# Altium PCB Front_PCB.PcbDoc
Units mm, origin at the board's own origin, x right, y up, seen from the top; angles counter-clockwise.
Board outline 89 x 28 mm, 2 copper layers (Top Layer, Bottom Layer); 19 components, 30 nets, 111 pads, 152 vias.
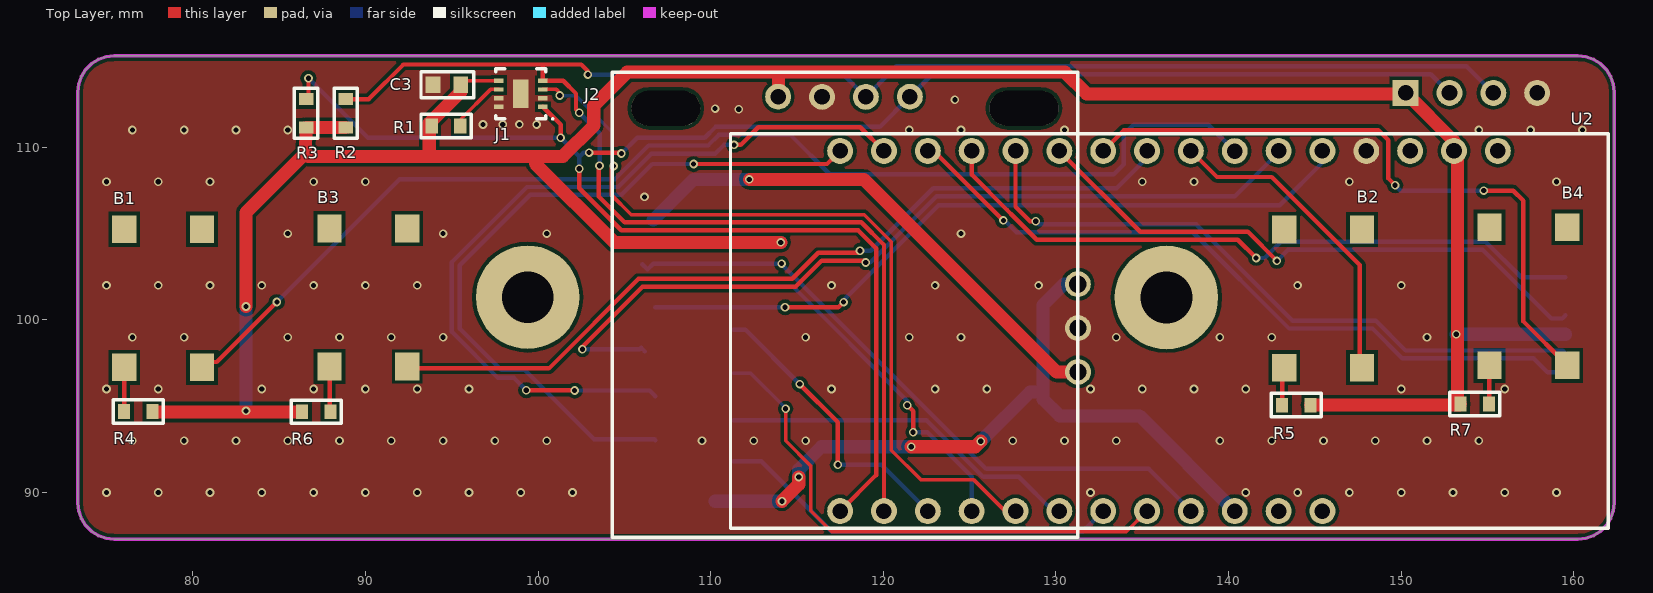
[diagram p0: Top Layer view]
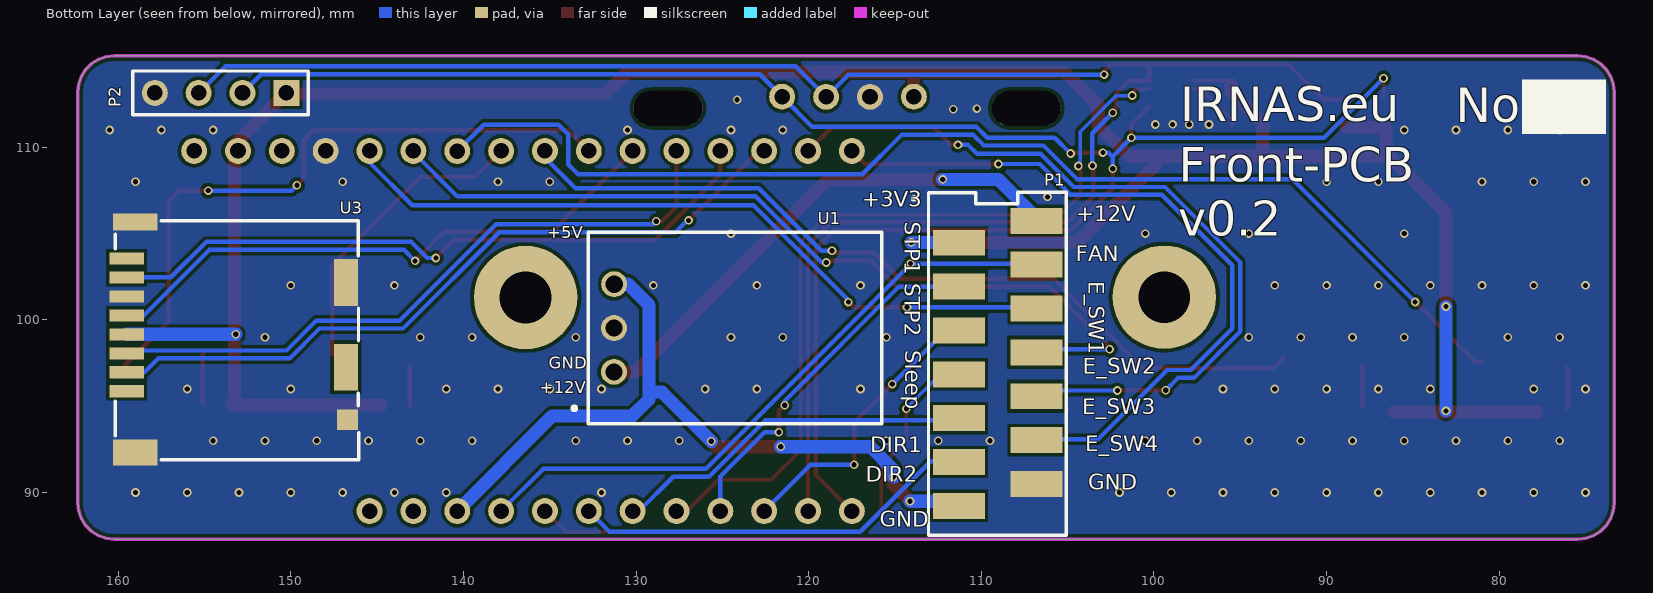
[diagram p1: Bottom Layer view, seen from below]

## Layer stack, top to bottom
Top Solder: solder mask 0.0102, Solder Resist, Dk 3.5
Top Layer: signal copper 0.0356
Dielectric 1: dielectric 0.32, FR-4, Dk 4.8
Bottom Layer: signal copper 0.0356
Bottom Solder: solder mask 0.0102, Solder Resist, Dk 3.5

## Board outline
160.24,87.3 75.44,87.3 74.973,87.353 74.529,87.508 74.131,87.758 73.798,88.091 73.548,88.489 73.393,88.933 73.34,89.4 73.34,113.2 73.393,113.667 73.548,114.111 73.798,114.509 74.131,114.842 74.529,115.092 74.973,115.247 75.44,115.3 160.24,115.3 160.707,115.247 161.151,115.092 161.549,114.842 161.882,114.509 162.132,114.111 162.287,113.667 162.34,113.2 162.34,89.4 162.287,88.933 162.132,88.489 161.882,88.091 161.549,87.758 161.151,87.508 160.707,87.353

## Design rules (kind name [scope] priority, off if disabled: settings)
Clearance Clearance_1 [All] p1: gap=0.203 ignorepadtopadclearanceinfootprint=FALSE except(0: Arc-Hole Track-Hole SMDPad-Hole THPad-Hole Via-Hole Fill-Hole Poly-Hole Region-Hole Text-Hole)
PolygonConnect [All] p1: connectstyle=Direct reliefconductorwidth=0.254 reliefentries=4 polygonreliefangle="90 Angle" airgapwidth=0.254
RoutingVias [All] p1: holewidth=0.3 width=0.5 viastyle="Through Hole" minholewidth=0.3 minwidth=0.5 maxholewidth=0.3 maxwidth=0.5
SilkToSolderMaskClearance [IsPad] p1: minsilkscreentomaskgap=0.01 clearancetoexposedcopper=TRUE
SolderMaskExpansion [All] p1: expansion=0.102
Width [All] p1: maxlimit=0.762 minlimit=0.203 preferedwidth=0.254
29 further rules are at their usual default settings.

## Components (designator, comment, footprint, x,y, rotation, side; value= is the part's Value field where it differs from the comment)
B1 "B3FS-1050" B3F-1050 80.53,97.25 r90 top
B2 "B3FS-1050" B3F-1050 147.73,97.24 r90 top
B3 "B3FS-1050" B3F-1050 92.42,97.3 r90 top
B4 "B3FS-1050" B3F-1050 159.62,97.37 r90 top
C3 "0.1uF" CAP0603 94.8,113.6 r0 top
J1 "SHT31" SON50P250X100_HS-9N 99,113.1 r180 top
J2 "LCD" LCD_DISPLAY 116.54,107.24 r0 top
P1 "micro_match" MICRO_MATCH 106.8,103.2 r180 bottom
P2 "Header 4" HDR1X4 150.26,113.15 r0 bottom
R1 "4K7" RES0603 94.8,111.1 r180 top
R2 "4K7" RES0603 89,112.1 r270 top
R3 "4K7" RES0603 86.7,112.1 r270 top
R4 "4K7" RES0603 76.71,94.83 r0 top
R5 "4K7" RES0603 143.8,95.2 r0 top
R6 "4K7" RES0603 87.28,94.55 r180 top
R7 "4K7" RES0603 154.4,95 r180 top
U1 "Voltage regulator" DC-DC 116.78,99.48 r270 bottom
U2 "ESP32" ESP32 133.16,98.98 r270 top
U3 "SD_CARD" SD_CARD 152.52,98.88 r270 bottom

## Footprints (in the part's own frame and the unit in brackets; to place one, negate y for a bottom-side part, rotate by r counter-clockwise, add the part's x,y. Pads: shape width x height; smd on the part's side, far side on the other; paste and mask are expansions set on the pad)
B3F-1050 [mm]
  rect 1.6x1.4 smd: 1(8,0) 2(0,0) 3(8,4.5) 4(0,4.5)
  body extent 0.02,-0.9 8.02,5.4, height 10.5
CAP0603 [mm]
  rect 0.85x0.95 smd: 1(-0.88,0.03) 2(0.72,0.03)
  silkscreen extent -1.58,-0.73 1.48,0.78, body extent -0.88,-0.37 0.72,0.43, height 0.6
DC-DC [mm]
  round 1.501 hole 1: 1(2.49,-14.5) 2(-0.05,-14.5)
  round 1.5 hole 1: 3(-2.59,-14.49)
  silkscreen extent -5.6,-16.9 5.5,1, body extent -5.6,-15.98 5.49,0.96, height 9.3
ESP32 [mm]
  round 1.5 hole 0.9: 1(-10.81,22.44) 2(-10.81,19.9) 3(-10.81,17.36) 4(-10.81,14.82) 5(-10.81,12.28) 6(-10.81,9.74) 7(-10.8,7.2) 8(-10.81,4.66) 9(-10.81,2.12) 10(-10.81,-0.42) 11(-10.81,-2.96) 12(-10.81,-5.5) 13(-10.81,-8.04) 14(-10.81,-10.58) 15(-10.81,-13.12) 16(-10.81,-15.66) 17(10.05,-15.66) 18(10.05,-13.12) 19(10.05,-10.58) 20(10.05,-8.04) 21(10.05,-5.5) 22(10.05,-2.96) 23(10.05,-0.42) 24(10.05,2.12) 25(10.05,4.66) 26(10.05,7.2) 27(10.05,9.74) 28(10.05,12.28)
  silkscreen extent -11.81,-22.01 11.04,28.83
HDR1X4 [mm] "Connector; Header; 4 Position"
  rect 1.5x1.5 hole 0.9: 1(0,0)
  round 1.5 hole 0.9: 2(2.54,0) 3(5.08,0) 4(7.62,0)
  silkscreen extent -1.27,-1.27 8.89,1.27
LCD_DISPLAY [mm]
  round 1.5 hole 0.9: 1(-2.63,5.69)
  round 1.501 hole 0.9: 2(-0.09,5.68) 3(2.45,5.68) 4(5,5.69)
  oval 4x2 hole 2.032 slot 3.988 at 0 deg unplated: ""(-9.14,5.02) ""(11.61,5.02)
  silkscreen extent -12.23,-19.84 14.73,7.12, body extent -12.15,-19.79 14.55,8.07, height 4.77
MICRO_MATCH [mm]
  rect 3x1.5 smd: 1(-4.5,1.27) 2(-4.5,-1.27) 3(-4.5,-3.81) 4(-4.5,-6.35) 5(-4.5,-8.89) 6(-4.5,-11.43) 7(-4.5,-13.97) 8(0,-12.7) 9(0,-10.16) 10(0,-7.62) 11(0,-5.08) 12(0,-2.54) 13(0,0) 14(0,2.54)
  silkscreen extent -7.16,-15.66 1.72,4.19, body extent -5.78,-15.61 1.22,4.1, height 5
RES0603 [mm]
  rect 0.7x0.85 smd: 1(-0.695,-0.135) 2(0.955,-0.135)
  silkscreen extent -1.32,-0.81 1.58,0.54, body extent -0.67,-0.54 0.93,0.26, height 0.6
SD_CARD [mm]
  rect 0.7x2 smd: 1(3.013,-6.993) 2(1.913,-6.993) 3(0.813,-6.993) 4(-0.287,-6.993) 5(-1.387,-6.993) 6(-2.487,-6.993) 7(-3.587,-6.993) 8(-4.687,-6.993)
  rect 1x2.6 smd: 9(-6.787,-6.493)
  rect 1.5x2.6 smd: 10(6.563,-6.493)
  rect 1.2x1.2 smd: 11(4.663,5.807)
  rect 2.7x1.4 smd: 12(1.613,5.707) 13(-3.287,5.707)
  silkscreen extent -6.86,-7.64 6.97,6.45, body extent -6.86,-9.03 6.94,6.35, height 1.98
SON50P250X100_HS-9N [mm] "SON, 8-Leads, Body 2.50x2.50mm, Pitch 0.50mm, Thermal Pad 1.65x0.69mm, IPC Medium Density"
  rect 0.55x0.25 smd: 1(-1.275,0.75) 2(-1.275,0.25) 3(-1.275,-0.25) 4(-1.275,-0.75) 5(1.275,-0.75) 6(1.275,-0.25) 7(1.275,0.25) 8(1.275,0.75)
  rect 0.9x1.65 smd: 9(0,0)
  silkscreen extent -1.9,-1.45 1.45,1.5, body extent -1.5,-1.3 1.5,1.3, height 1

## Part data
B1 B2 B3 B4: library part B3F-1050, "OMRON ELECTRONIC COMPONENTS         B3F-1050             Tactile Switch, Non Illuminated, 24 V, 50 mA, 0.98 N, Solder, B3F Series", Actuator Color=Black, Contact Rating @ Voltage="0.05@24VDC A", Dielectric Strength="250 VAC", Manufacturer=Omron, Maximum AC Voltage Rating=N/A, Maximum Contact Resistance="100 mOhm", Maximum DC Voltage Rating="24 V", Minimum Insulation Resistance="100 MOhm", Operating Force="0.98 N", Operating Temperature="-25 to 70 C", Supplier Part Number 1=3121185, Actuator Length="4.7 mm", Actuator Style="Projected Plunger", Base Material=N/A, Body Orientation=Straight, ComponentLink1Description=http://www.onlinecomponents.com/productFiles/mf-OM/en-b3fs.pdf, ComponentLink1URL=http://www.onlinecomponents.com/productFiles/mf-OM/en-b3fs.pdf, ComponentLink2Description=http://www.farnell.com/datasheets/1518732.pdf, ComponentLink2URL=http://www.farnell.com/datasheets/1518732.pdf, ComponentLink3Description=http://omronfs.omron.com/en_US/ecb/products/pdf/en-b3fs.pdf, ComponentLink3URL=http://omronfs.omron.com/en_US/ecb/products/pdf/en-b3fs.pdf, Contact Material=N/A, Contact Plating=Silver, Dimension="6.3 x 8 x 7.3 mm", Electrical Life="1000000 Cycles", Family=B3FS, Ground Terminal=No, Housing Material=N/A, Illumination Type=N/R, Manufacturer Part Number=B3FS-1050, Mechanical Life=N/A, Mounting="Surface Mount,Gull Wing", Packaging=Bag, Part No=B3FS-1050, Pole Throw Configuration=SPST, Pricing 1="5=1.6, 100=1.52, 250=1.44, 1000=1.12, 2500=1.04 (GBP)", Product Weight="0.2 g", RoHS=Yes, Seal Description=N/A, Seal Location=N/A, Stock 1=1716, Supplier 1=Farnell, Switch Configuration=N.O., Type=N/A
C3: library part "0.1uF Cap", "KEMET         C0603C104K4RAC7081             SMD Multilayer Ceramic Capacitor, 0603 [1608 Metric], 0.1 F, 16 V,  10%, X7R, C Series", Capacitance=0.1µF, Capacitance Tolerance="± 10%", Ceramic Capacitor Case="0603 [1608 Metric]", Dielectric Characteristic=X7R, Manufacturer=KEMET, Manufacturer Part Number=C0603C104K4RAC7081, Operating Temperature Max=125°C, Operating Temperature Min=-55°C, Supplier Part Number 1=2522597, Voltage Rating=16V, Automotive Qualification Standard=-, ComponentLink1Description=http://www.farnell.com/datasheets/2112158.pdf, ComponentLink1URL=http://www.farnell.com/datasheets/2112158.pdf, ComponentLink2Description=http://www.farnell.com/datasheets/2316283.pdf, ComponentLink2URL=http://www.farnell.com/datasheets/2316283.pdf, ComponentLink3Description=https://api.kemet.com/component-edge/download/datasheet/C0603C104K4RAC7081.pdf, ComponentLink3URL=https://api.kemet.com/component-edge/download/datasheet/C0603C104K4RAC7081.pdf, MSL="MSL 1 - Unlimited", Packaging="Cut Tape", Pricing 1="10=0.0639, 100=0.0337, 500=0.0247, 2500=0.0209 (EUR)", Product Range="C Series", Stock 1=98220, Supplier 1=Farnell, SVHC="No SVHC (15-Jun-2015)"
J1: library part SHT31-DIS-B, "SENSIRION         SHT31-DIS-B             Humidity Sensor, 2 %, 3.3 V, 0% to 100% Relative Humidity, TDFN, 8 Pins, 8 s", Manufacturer=Sensirion, Maximum Operating Supply Voltage="5.5 V", Maximum Operating Temperature="+125 °C", Minimum Operating Supply Voltage="2.4 V", Minimum Operating Temperature="-40 °C", Package Type=DFN, Supplier Part Number 1=2474218, Accuracy="±0.3 (Temperature) °C, ±2 (Humidity) %RH", ComponentLink1Description=http://www.farnell.com/datasheets/1905459.pdf, ComponentLink1URL=http://www.farnell.com/datasheets/1905459.pdf, ComponentLink2Description=http://uk.rs-online.com/webdocs/13dd/0900766b813ddc9f.pdf, ComponentLink2URL=http://uk.rs-online.com/webdocs/13dd/0900766b813ddc9f.pdf, ComponentLink3Description=https://www.sensirion.com/fileadmin/user_upload/customers/sensirion/Dokumente/2_Humidity_Sensors/Sensirion_Humidity_Sensors_Testing_Guide_V1.2.pdf, ComponentLink3URL=https://www.sensirion.com/fileadmin/user_upload/customers/sensirion/Dokumente/2_Humidity_Sensors/Sensirion_Humidity_Sensors_Testing_Guide_V1.2.pdf, ComponentLink4Description=http://www.farnell.com/datasheets/2611771.pdf, ComponentLink4URL=http://www.farnell.com/datasheets/2611771.pdf, ComponentLink5Description=https://www.sensirion.com/file/datasheet_filter-membrane, ComponentLink5URL=https://www.sensirion.com/file/datasheet_filter-membrane, Dimensions="2.6 x 2.6 x 1mm", Height=1mm, Interface Type=I2C, Length=2.6mm, Manufacturer Part Number=SHT31-DIS-B, Mounting Type="Surface Mount", Output Type=Digital, Pin Count=8, Resolution="0.05 (Humidity) %RH, 0.05 (Temperature) °C", Sensor Function="Temperature & Humidity", Stock 1=0, Supplier 1=Farnell, Width=2.6mm
J2: library part LCD_DISPLAY
P1: library part 1-2178711-4, "AMP FROM TE CONNECTIVITY         1-2178711-4             Wire-To-Board Connector, Micro-MaTch Value-Line Series, 14 Contacts, Receptacle, 1.27 mm", Manufacturer="TE Connectivity AMP", Supplier Part Number 1=2473362, Body Orientation=Straight, Contact Material="Copper Alloy", Manufacturer Part Number=1-2178711-4, Mounting Type="Surface Mount", Number of Contacts=14, Number of Rows=2, Pitch=1.27mm, Pricing 1="1=1.24, 25=1.15, 70=1.06, 200=0.977, 450=0.89 (EUR)", Series=Micro-MaTch, Stock 1=904, Supplier 1=Farnell, Termination Method=Solder, Type="Board to Board"
P2: "Header, 4-Pin", LatestRevisionDate=17-Jul-2002, LatestRevisionNote="Re-released for DXP Platform.", Publisher="Altium Limited"
R1 R2 R3 R4 R5 R6 R7: "Res Thin Film 0603 4.7K Ohm 0.1% 0.1W(1/10W) ±25ppm/C Molded SMD Automotive Punched T/R", Case Size="0603 (1608 Metric)", Manufacturer=Panasonic, Manufacturer Part Number=ERA-3AEB472V, Operating Temp Range="-55 to +155 °C", Overload Voltage - Max="150 V", Rated Power="0.1 W", Resistance="4.7 kO", Supplier Part Number 1=1577615, Temp Coefficient="±25 ppm/°C", Tolerance (%)="±0.1 %", Working Voltage-Nom="75 V", ComponentLink1Description=https://datasheet.ciiva.com/11808/0900766b80fe20f7-11808039.pdf, ComponentLink1URL=https://datasheet.ciiva.com/11808/0900766b80fe20f7-11808039.pdf, ComponentLink2Description=https://datasheet.ciiva.com/29183/451124-da-01-en-widerstand-0603-era-29183789.pdf, ComponentLink2URL=https://datasheet.ciiva.com/29183/451124-da-01-en-widerstand-0603-era-29183789.pdf, ComponentLink3Description=https://datasheet.ciiva.com/22743/485442-22743061.pdf, ComponentLink3URL=https://datasheet.ciiva.com/22743/485442-22743061.pdf, ComponentLink4Description=https://datasheet.ciiva.com/46422/485442-46422693.pdf, ComponentLink4URL=https://datasheet.ciiva.com/46422/485442-46422693.pdf, ComponentLink5Description=https://datasheet.ciiva.com/9116/aoa0000ce26-9116681.pdf, ComponentLink5URL=https://datasheet.ciiva.com/9116/aoa0000ce26-9116681.pdf, ComponentLink6Description=https://datasheet.ciiva.com/22781/485442-22781497.pdf, ComponentLink6URL=https://datasheet.ciiva.com/22781/485442-22781497.pdf, ComponentLink7Description=https://datasheet.ciiva.com/9117/aoa0000ce26-9117707.pdf, ComponentLink7URL=https://datasheet.ciiva.com/9117/aoa0000ce26-9117707.pdf, ComponentLink8Description=https://datasheet.ciiva.com/43455/485442-43455227.pdf, ComponentLink8URL=https://datasheet.ciiva.com/43455/485442-43455227.pdf, ComponentLink9Description=https://datasheet.ciiva.com/16772/70068849-16772572.pdf, ComponentLink9URL=https://datasheet.ciiva.com/16772/70068849-16772572.pdf, ComponentLink10Description=https://datasheet.ciiva.com/48425/era-eng-tds-48425470.pdf, ComponentLink10URL=https://datasheet.ciiva.com/48425/era-eng-tds-48425470.pdf, ComponentLink11Description=https://datasheet.ciiva.com/30078/54aoa0000ce26-30078815.pdf, ComponentLink11URL=https://datasheet.ciiva.com/30078/54aoa0000ce26-30078815.pdf, Height - Max="0.55 mm", No. of Terminations=2, Pricing 1="10=0.191, 100=0.109, 500=0.0637, 2500=0.0489 (EUR)", Stock 1=4010, Supplier 1=Farnell, Technology="Thin Film"
U1: library part OKI-78SR-5/1.5-W36-C, "Non-Isolated DC/DC Converters 7.5W 24Vin 5Vout1 1.5A SIP Non-Iso", Current - Output (Max)=1.5A, Manufacturer=Murata, Operating Temperature="-40°C ~ 85°C", Package / Case="3-SIP Module", Power (Watts) - Manufacture Series=8W, Supplier Part Number 1=2102101, Voltage - Input (Max)=36V, Voltage - Input (Min)=7V, Voltage - Isolation=-, Voltage - Output 1=5V, Applications="ITE (Commercial)", Category="Power Supplies - Board Mount", ComponentLink1Description=https://datasheet.ciiva.com/8006/1790439-8006672.pdf, ComponentLink1URL=https://datasheet.ciiva.com/8006/1790439-8006672.pdf, ComponentLink2Description=https://datasheet.ciiva.com/2374/oki-78sr-2374163.pdf, ComponentLink2URL=https://datasheet.ciiva.com/2374/oki-78sr-2374163.pdf, ComponentLink3Description=https://datasheet.ciiva.com/8220/oki-78sr-8220327.pdf, ComponentLink3URL=https://datasheet.ciiva.com/8220/oki-78sr-8220327.pdf, ComponentLink4Description=https://datasheet.ciiva.com/4646/oki-78sr-56393-4646361.pdf, ComponentLink4URL=https://datasheet.ciiva.com/4646/oki-78sr-56393-4646361.pdf, ComponentLink5Description=https://datasheet.ciiva.com/6917/1790439-6917306.pdf, ComponentLink5URL=https://datasheet.ciiva.com/6917/1790439-6917306.pdf, ComponentLink6Description=https://datasheet.ciiva.com/17327/oki-78sr-17327359.pdf, ComponentLink6URL=https://datasheet.ciiva.com/17327/oki-78sr-17327359.pdf, Efficiency=90.5%, Family="DC DC Converters", Features=SCP, Manufacturer Part Number=OKI-78SR-5/1.5-W36-C, Mounting Type="Through Hole", Number of Outputs=1, Packaging=Tube, Power (Watts) - Max=8W, Series="Okami™ OKI-78SR", Size / Dimension="0.41\" L x 0.30\" W x 0.65\" H (10.4mm x 7.6mm x 16.5mm)", Stock 1=0, Supplier 1=Farnell, Type="Linear Regulator Replacement", Voltage - Output 2=-, Voltage - Output 3=-
U3: Manufacturer=Hirose, Manufacturer Part Number=DM3CS-SF, Standard Package=1, Supplier Part Number 1=1764376, Card Type="Secure Digital - microSD™", Category="Connectors, Interconnects", ComponentLink1Description=https://datasheet.ciiva.com/683/e60900232-683360.pdf, ComponentLink1URL=https://datasheet.ciiva.com/683/e60900232-683360.pdf, ComponentLink2Description=https://datasheet.ciiva.com/683/e60900232-683361.pdf, ComponentLink2URL=https://datasheet.ciiva.com/683/e60900232-683361.pdf, ComponentLink3Description=https://datasheet.ciiva.com/7651/1465328-7651895.pdf, ComponentLink3URL=https://datasheet.ciiva.com/7651/1465328-7651895.pdf, ComponentLink4Description=https://datasheet.ciiva.com/3122/e60900232-3122536.pdf, ComponentLink4URL=https://datasheet.ciiva.com/3122/e60900232-3122536.pdf, ComponentLink5Description=https://datasheet.ciiva.com/4581/e60900232-38395-4581034.pdf, ComponentLink5URL=https://datasheet.ciiva.com/4581/e60900232-38395-4581034.pdf, ComponentLink6Description=https://datasheet.ciiva.com/16434/e60900232-16434058.pdf, ComponentLink6URL=https://datasheet.ciiva.com/16434/e60900232-16434058.pdf, ComponentLink7Description=https://datasheet.ciiva.com/16655/e60900232-16655644.pdf, ComponentLink7URL=https://datasheet.ciiva.com/16655/e60900232-16655644.pdf, ComponentLink8Description=https://datasheet.ciiva.com/683/e60900232-683359.pdf, ComponentLink8URL=https://datasheet.ciiva.com/683/e60900232-683359.pdf, Connector Type="Connector and Ejector", Contact Finish=Gold, Contact Finish Thickness=-, Ejector Side=-, Family="Memory Connectors - PC Card Sockets", Featured Product="DM3CS Connector", Features=Switch, Height Above Board="0.072\" (1.83mm)", HTML Datasheet="DM3 Series microSD.html", Insertion, Removal Method="Hinged Lid", Mounting Feature="Normal, Standard - Top", Mounting Type="Surface Mount, Right Angle", Number of Positions="10 (8 + 2)", Online Catalog="DM3 Series", Other Names=HR1972DKR, Packaging=Digi-Reel®, Product Training Modules="DM3 Series microSD Card Sockets", Series=DM3, Stock 1=0, Supplier 1=Farnell

## Free pads (board coordinates)
  round 6 hole 3 unplated: 1(136.4,101.3) 2(99.4,101.32)

## Via types
v1: diameter 0.5, hole 0.3, Top Layer to Bottom Layer, tented both sides, 152 vias

## Nets (pads, with @x,y where several pads share a name; then routed paths per layer and width w, separated by ;. In a path a pad name is that pad's centre, name@x,y a point inside that pad or via, vN(x,y) a via of type N, cw(c..) or ccw(c..) an arc to the next point about the centre after c; other vN are vias at no path point)
+3V3: C3.2 J1.5 J2.1 P1.1 P2.1 R1.2 R2.2 R3.2 R4.2 R5.2 R6.2 R7.2 U2.2 U3.4 | length 157.7
  Top Layer w0.203: C3.2 95.74,113.85 J1.5
  Top Layer w0.762: R4.2@77.85,94.67 R6.2@86.11,94.67 ; v1(83.08,100.78) 83.08,106.217 86.513,109.65 ; R2.2 R3.2 86.528,109.65 86.513,109.65 ; C3.2 95.52,113.22 93.7,111.4 93.7,109.47 ; J2.1 113.93,112.95 113.93,114.36 ; v1(114.06,104.49) 104.42,104.49 99.85,109.06 99.85,109.47 ; R5.2 R7.2@153.375,95.065 ; P2.1@150.25,113.09 131.78,113.09 130.51,114.36 113.93,114.36 ; P2.1 153.06,110.35 U2.2 153.26,109.59 153.26,95.32 R7.2 ; 86.513,109.65 86.693,109.47 93.7,109.47 ; 93.7,109.47 99.85,109.47 ; 99.85,109.47 101.44,109.47 103.224,111.254 103.224,112.414 105.17,114.36 113.93,114.36
  Bottom Layer w0.762: v1(83.08,94.73) v1(83.08,100.78) ; P1.1@111.3,104.49 v1(114.06,104.49) ; v1(153.193,99.167) U3.4
+5V: P1.7 U1.3 U2.26 | length 44.2
  Top Layer w0.762: v1(114.13,89.5) 115.1,90.47 v1(115.1,90.9) ; v1(121.62,92.65) 125.33,92.65 v1(125.65,92.97) ; U2.26 U2.26@140.56,89.13
  Bottom Layer w0.762: P1.7@110.26,89.5 v1(114.13,89.5) ; v1(115.1,90.9) 115.1,91.33 116.42,92.65 v1(121.62,92.65) ; v1(125.65,92.97) 128.5,95.82 129.26,95.82 ; U1.3 130.46,102.07 129.26,100.87 129.26,95.82 ; U2.26 134.85,94.44 130.21,94.44 129.26,95.39 129.26,95.82
+12V: P1.14 U1.1 | length 30.2
  Top Layer w0.762: v1(112.24,108.144) 118.876,108.144 130.03,96.99 U1.1
  Bottom Layer w0.762: P1.14@106.67,105.79 109.024,108.144 v1(112.24,108.144)
ALERT: J1.3 U2.21 | length 46.9
  Top Layer w0.203: J1.3 101.067,113.35 101.26,113.157 v1(101.26,113) ; v1(104.38,108.92) 104.23,108.77 104.23,107.263 105.402,106.09 118.907,106.09 120.472,104.525 120.472,92.458 122.2,90.73 125.251,90.73 127.051,88.93 U2.21
  Bottom Layer w0.203: v1(101.26,113) 102.174,113 104.27,110.904 v1@104.27,108.92
Button1: B1.2 U2.7 | length 68.7
  Top Layer w0.254: B1.2@80.94,97.56 81.39,97.56 v1(84.87,101.04)
  Bottom Layer w0.254: v1(84.87,101.04) 91.99,108.16 104.46,108.16 106.403,110.103 109.849,110.103 110.467,110.72 114.62,110.72 116.9,108.44 133.36,108.44 133.93,109.01 133.93,110.74 134.5,111.31 138.83,111.31 U2.7
Button2: B2.2 U2.8 | length 17.7
  Top Layer w0.254: U2.8 139.33,108.28 142.5,108.28 147.6,103.18 B2.2@147.6,98
Button3: B3.2 U2.9 | length 48.5
  Top Layer w0.254: B3.2@92.5,97.79 93.1,97.19 100.63,97.19 105.82,102.38 114.73,102.38 116.237,103.887 118.527,103.887 v1(118.65,104.01)
  Bottom Layer w0.254: v1(118.65,104.01) 119.277,104.01 122.894,107.627 133.507,107.627 135.28,109.4 U2.9
Button4: B4.2 U2.10 | length 38.8
  Top Layer w0.254: U2.10 133.94,110.99 148.68,110.99 149.26,110.41 149.26,108.19 v1(149.65,107.8) ; v1(154.78,107.49) 156.5,107.49 157.08,106.91 157.08,99.91 B4.2
  Bottom Layer w0.254: U2.10 U2.10@132.98,110.03 ; v1(149.65,107.8) 149.96,107.49 v1(154.78,107.49)
CLK: U2.11 U3.5 | length 34
  Top Layer w0.254: U2.11 134.883,105.107 141.123,105.107 142.81,103.42 v1(142.8,103.42)
  Bottom Layer w0.254: v1(142.8,103.42) 143.443,104.063 154.711,104.063 158.693,100.08 159.326,100.08 U3.5
CMD: U2.12 U3.3 | length 38.6
  Top Layer w0.254: U2.12 127.66,106.56 128.5,105.72 v1(128.83,105.72)
  Bottom Layer w0.254: v1(128.83,105.72) 129.013,105.537 138.119,105.537 143.697,99.96 148.527,99.96 150.257,98.23 159.35,98.23 U3.3
DAT0: U2.13 U3.7 | length 39
  Top Layer w0.254: U2.13 125.12,108.42 127.195,106.345 ; 127.195,106.345 127.535,106.005 ; 127.535,106.005 128.89,104.65 140.54,104.65 v1(141.6,103.59)
  Bottom Layer w0.254: U2.13 U2.13@125.12,109.818 ; v1(141.6,103.59) 142.1,103.59 143.03,104.52 154.9,104.52 156.953,102.467 U3.7
DAT3: U2.14 U3.2 | length 42.2
  Top Layer w0.254: U2.14 122.93,109.79 v1(126.955,105.765)
  Bottom Layer w0.254: v1(126.955,105.765) 127.035,105.765 127.72,105.08 137.93,105.08 143.507,99.503 148.337,99.503 150.067,97.773 157.677,97.773 158.483,96.967 U3.2
DIR1: P1.5 U2.22 | length 21.1
  Bottom Layer w0.254: P1.5@111.3,94.18 122.513,94.18 125.781,90.913 127.847,90.913 129.83,88.93 U2.22
DIR2: P1.6 U2.23 | length 23.6
  Bottom Layer w0.254: P1.6@111.3,91.82 112.93,91.82 117.02,87.73 131.54,87.73 U2.23
E_SW1: P1.12 U2.5 | length 42.8
  Top Layer w0.254: v1(114.31,100.73) 117.4,100.73 v1(117.7,101.03)
  Bottom Layer w0.254: P1.12@106.8,100.73 v1(114.31,100.73) ; v1(117.7,101.03) 117.7,101.14 123.2,106.64 142.96,106.64 145.44,109.12 U2.5
E_SW2: P1.11 U2.6 | length 49
  Top Layer w0.254: v1(102.57,98.3) 102.57,98.44 106.053,101.923 114.919,101.923 116.426,103.43 118.88,103.43 v1(118.98,103.33)
  Bottom Layer w0.254: v1(102.57,98.3) 105.9,98.3 105.98,98.38 P1.11@106.19,98.17 ; v1(118.98,103.33) 119.243,103.33 123.083,107.17 140.37,107.17 142.9,109.7 U2.6
E_SW3: P1.10 U2.15 | length 46.2
  Top Layer w0.254: v1(99.32,95.93) 102.1,95.93 v1(102.12,95.91) ; v1(111.35,110.14) 111.74,110.14 112.76,111.16 118.67,111.16 U2.15
  Bottom Layer w0.254: v1(99.32,95.93) 98.61,96.64 97.68,96.64 95.01,99.31 95.01,103.35 99.363,107.703 104.649,107.703 106.567,109.62 110.25,109.62 110.77,110.14 v1(111.35,110.14) ; v1(102.12,95.91) 106.47,95.91 P1.10
E_SW4: P1.9 U2.16 | length 42.4
  Top Layer w0.254: v1(109.01,109.03) 116.74,109.03 U2.16
  Bottom Layer w0.254: P1.9 106.75,93.09 103.24,93.09 99.233,97.097 97.87,97.097 95.47,99.497 95.47,103.163 99.552,107.246 104.839,107.246 106.623,109.03 v1(109.01,109.03)
FAN: P1.13 U2.25 | length 38
  Bottom Layer w0.254: P1.13@106.03,103.23 106.34,102.92 106.67,103.25 114.1,103.25 v1(114.11,103.26) 114.11,103.23 125.97,91.37 135.38,91.37 U2.25
GND: C3.1 J1.2 J1.7 J1.8 J1.9 J2.2 P1.8 P2.4 U1.2 U2.4 U3.6 U3.9 U3.10 U3.11 U3.13
  other v1: 75,90 78,90 81,90 84,90 87,90 90,90 93,90 96,90 99,90 102,90 132,90 141,90 144,90 147,90 150,90 153,90 156,90 159,90 76.5,93 79.5,93 82.5,93 85.5,93 88.5,93 91.5,93 94.5,93 97.5,93 100.5,93 109.5,93 112.5,93 115.5,93 127.5,93 130.5,93 133.5,93 139.5,93 142.5,93 145.5,93 148.5,93 151.5,93 154.5,93 75,96 78,96 84,96 87,96 90,96 93,96 96,96 117,96 123,96 126,96 132,96 135,96 138,96 141,96 150,96 156,96 76.5,99 79.5,99 85.5,99 88.5,99 91.5,99 94.5,99 115.5,99 121.5,99 124.5,99 133.5,99 139.5,99 142.5,99 151.5,99 75,102 78,102 81,102 84,102 87,102 90,102 93,102 117,102 123,102 129,102 144,102 150,102 85.5,105 94.5,105 100.5,105 124.5,105 106.17,107.13 75,108 78,108 81,108 87,108 90,108 135,108 138,108 147,108 159,108 76.5,111 79.5,111 82.5,111 85.5,111 121.5,111 124.5,111 130.5,111 154.5,111 157.5,111 160.5,111 96.81,111.32 97.96,111.32 98.92,111.33 99.92,111.32 111.63,112.2 110.26,112.24 124.15,112.76
NetB1_4: B1.4 R4.1 | length 2.4
  Top Layer w0.254: R4.1@76.025,94.845 76.025,97.245 B1.4
NetB2_4: B2.4 R5.1 | length 2.2
  Top Layer w0.254: R5.1 B2.4@143.105,97.24
NetB3_4: B3.4 R6.1 | length 2.3
  Top Layer w0.254: B3.4 87.925,97.295 R6.1@87.925,95.015
NetB4_4: B4.4 R7.1 | length 2.9
  Top Layer w0.254: B4.4@155.08,98.03 155.095,98.015 R7.1
NetJ1_6: J1.6 R1.1 | length 3.3
  Top Layer w0.203: R1.1 95.495,111.595 97.25,113.35 J1.6
SCL: J1.4 J2.3 P2.3 R2.1 U2.18 | length 112.2
  Top Layer w0.254: R2.1 90.195,112.795 92.2,114.8 100.2,114.8 ; v1(102.39,112) 102.2,112.19 102.2,113.11 101.46,113.85 J1.4 100.275,114.725 100.2,114.8 ; v1@102.89,114.41 102.5,114.8 100.2,114.8 ; v1(103.56,108.93) 103.52,108.89 103.52,107.152 105.013,105.658 114.544,105.658 ; 114.545,105.658 118.729,105.658 120.04,104.347 U2.18
  Bottom Layer w0.254: v1(102.39,112) 103.58,110.809 v1@103.58,108.93 ; v1(102.89,114.21) 117.7,114.21 J2.3 120.757,114.687 153.803,114.687 P2.3
SDA: J1.1 J2.4 P2.2 R3.1 U2.17 | length 110.3
  Top Layer w0.254: R3.1@86.7,112.93 v1(86.7,114) ; J1.1 101.31,111.315 v1(101.31,110.55) ; v1(102.39,108.76) 102.39,107.635 104.824,105.201 114.355,105.201 ; v1(102.96,109.69) 104.78,109.69 v1(104.83,109.64) ; 114.355,105.201 118.539,105.201 119.583,104.157 119.583,91.013 U2.17
  Bottom Layer w0.254: v1(86.7,114) 90.15,110.55 v1(101.31,110.55) 102.39,109.47 v1(102.39,108.76) ; 102.37,109.43 102.63,109.69 v1(102.96,109.69) ; v1(104.83,109.64) 105.75,110.56 109.66,110.56 110.28,111.18 119.79,111.18 J2.4 122.84,114.23 151.72,114.23 P2.2
Sleep: P1.4 U2.24 | length 30.9
  Top Layer w0.203: v1@114.34,94.88 v1(114.34,94.86) 114.34,93 115.8,91.54 115.8,88.95 117.02,87.73 134.08,87.73 U2.24
  Bottom Layer w0.203: P1.4@111.3,96.9 112.32,96.9 114.34,94.88 v1(114.34,94.86)
STP1: P1.2 U2.20 | length 21.5
  Top Layer w0.254: v1(121.39,95.06) 121.73,94.72 ; v1(121.73,93.49) 121.73,94.72 ; U2.20 U2.20@125.12,89.15
  Bottom Layer w0.254: P1.2 114.763,101.93 121.39,95.303 v1(121.39,95.06) ; v1(121.73,93.49) 122.557,93.49 125.12,90.927 U2.20
STP2: P1.3 U2.19 | length 17.1
  Top Layer w0.254: v1(115.16,96.28) 117.37,94.07 v1(117.37,91.61)
  Bottom Layer w0.254: P1.3@111.3,99.44 112,99.44 v1(115.16,96.28) ; v1(117.37,91.61) 119.9,91.61 U2.19
pads on no net: B1.1 B1.3 B2.1 B2.3 B3.1 B3.3 B4.1 B4.3 J2. U2.1 U2.3 U2.27 U2.28 U3.1 U3.8 U3.12

## Polygon pours and split planes (outlines as drawn)
GND on Bottom Layer "GND" (solid, remove dead copper, pour order 1): 160.24,87.3 75.44,87.3 74.973,87.353 74.529,87.508 74.131,87.758 73.798,88.091 73.548,88.489 73.393,88.933 73.34,89.4 73.34,113.2 73.393,113.667 73.548,114.111 73.798,114.509 74.131,114.842 74.529,115.092 74.973,115.247 75.44,115.3 160.24,115.3 160.707,115.247 161.151,115.092 161.549,114.842 161.882,114.509 162.132,114.111 162.287,113.667 162.34,113.2 162.34,89.4 162.287,88.933 162.132,88.489 161.882,88.091 161.549,87.758 161.151,87.508 160.707,87.353
GND on Top Layer "GND_L01_P000" (solid, remove dead copper, pour order 0): 160.24,87.3 75.44,87.3 74.973,87.353 74.529,87.508 74.131,87.758 73.798,88.091 73.548,88.489 73.393,88.933 73.34,89.4 73.34,113.2 73.393,113.667 73.548,114.111 73.798,114.509 74.131,114.842 74.529,115.092 74.973,115.247 75.44,115.3 160.24,115.3 160.707,115.247 161.151,115.092 161.549,114.842 161.882,114.509 162.132,114.111 162.287,113.667 162.34,113.2 162.34,89.4 162.287,88.933 162.132,88.489 161.882,88.091 161.549,87.758 161.151,87.508 160.707,87.353

## Keep-outs
Keep-Out Layer:
  the board outline again, w0.2

## Silkscreen, mask and mechanical layers (free items; w line width, h text height)
Bottom Overlay:
  rectangle: 73.82,110.76 78.69,113.94
  text "IRNAS.eu" at 98.49,111.5 h2
  text "No" at 82.52,111.44 h2
  text "Front-PCB" at 98.56,108 h2
  text "+3V3" at 116.91,106.57 h0.9
  text "+12V" at 104.5,105.73 h0.9
  text "STP1" at 114.43,105.69 h0.9 r90
  text "v0.2" at 98.59,104.89 h2
  text "+5V" at 135.16,104.73 h0.7
  text "FAN" at 104.52,103.39 h0.9
  text "E_SW1" at 103.78,102.23 h0.9 r90
  text "STP2" at 114.43,102.13 h0.9 r90
  text "Sleep" at 114.4,98.23 h0.9 r90
  text "GND" at 135.06,97.16 h0.7
  text "E_SW2" at 104.12,96.88 h0.9
  text "+12V" at 135.58,95.74 h0.7
  text "E_SW3" at 104.14,94.55 h0.9
  text "E_SW4" at 103.98,92.4 h0.9
  text "DIR1" at 116.43,92.34 h0.9
  text "DIR2" at 116.7,90.62 h0.9
  text "GND" at 103.8,90.15 h0.9
  text "GND" at 115.89,88.01 h0.9

## Dimensions
73.34,89.4 to 162.34,91.16 on Mechanical 1
160.24,87.3 to 157.35,115.3 on Mechanical 1